# EAGLE board RT5350F_OLinuXino_EVB_Rev_A (EAGLE 4.16)
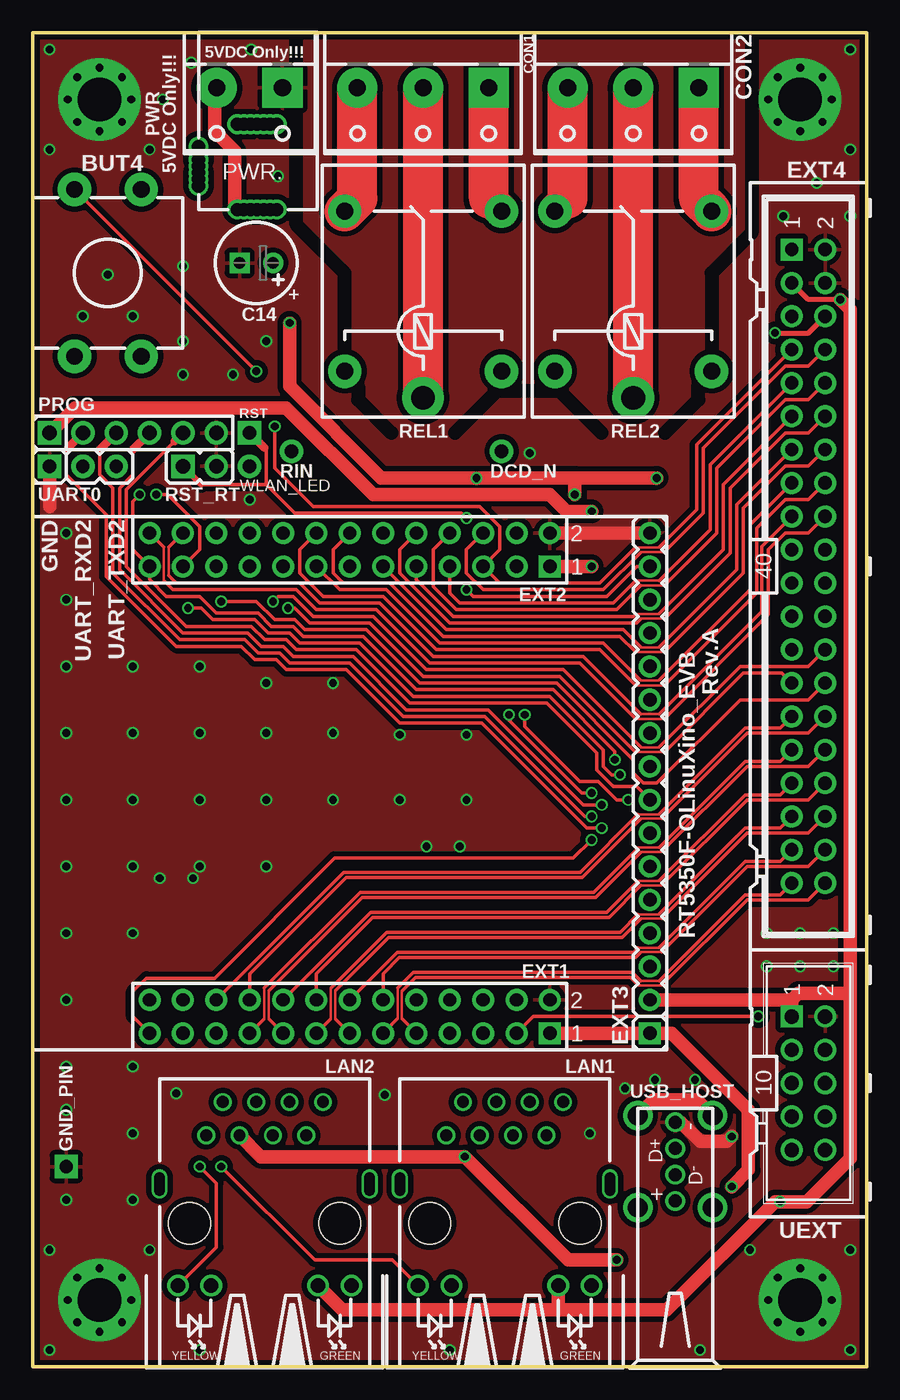
[diagram p0: board, top side]
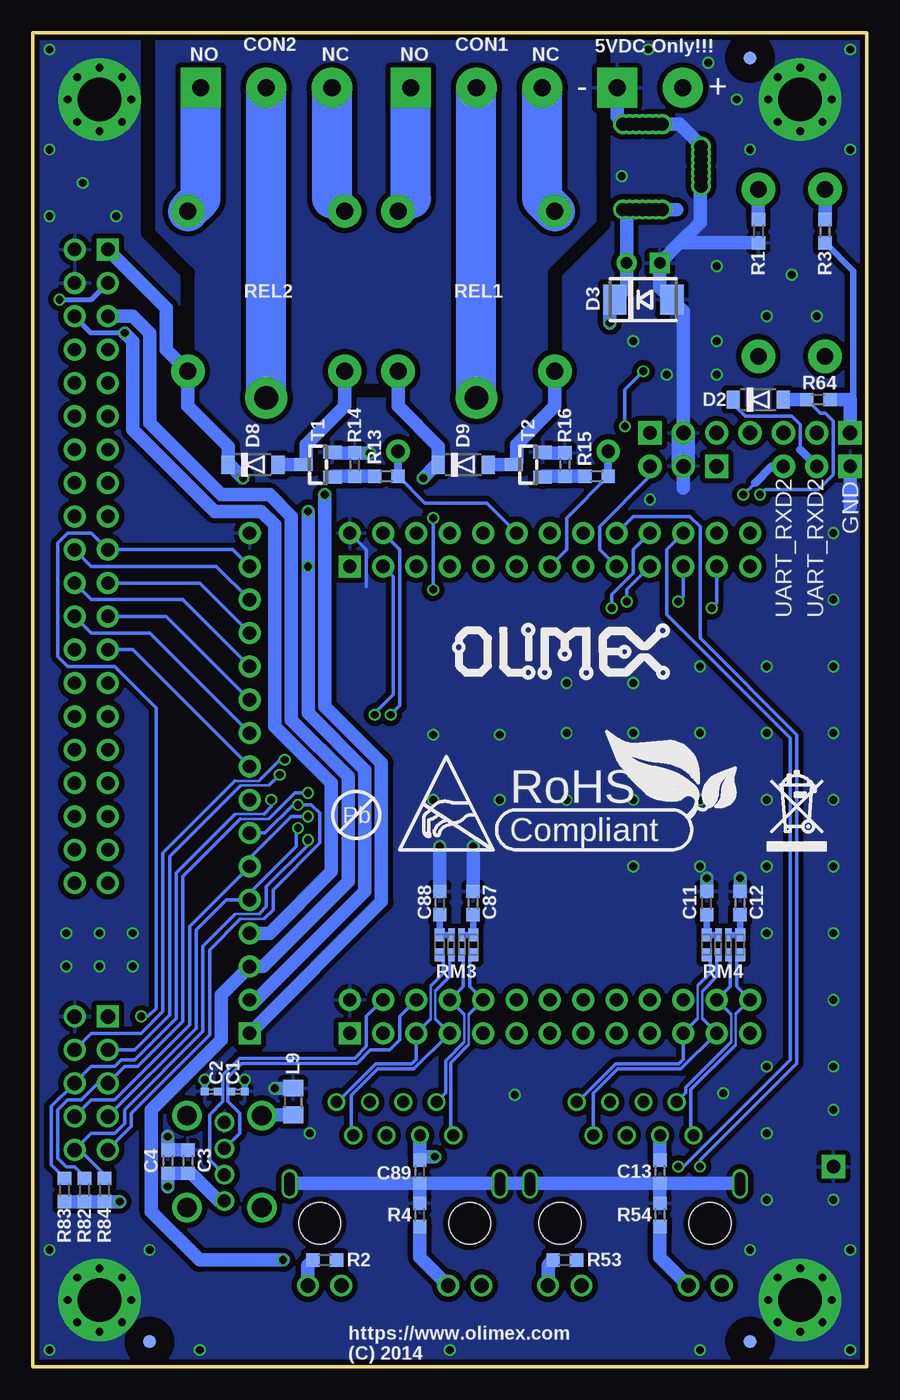
[diagram p1: board, bottom side, seen from below]

Size 63.5 x 101.6 mm. Coordinates in mm from the lower left corner, seen from the top.
Outline: 0,101.6 0,0 63.5,0 63.5,101.6 0,101.6
Copper layers (1*16): Top 0.035mm / dielectric 1.5mm / Bottom 0.035mm
Design rules "default": minimum track width 4mil, minimum drill 0.25mm, track to track 5mil, track to pad 5mil, pad to pad 5mil, via to via 5mil, smd to smd 1mil, copper to edge 10mil, drill to drill 8mil, minimum pad ring 6mil, minimum via ring 4mil, stop-mask expansion 4mil, vias tented up to drill 24mil, thermal gap 15mil
Net classes: 4 REL: width 2.032 mm, drill 2.54 mm
tRestrict: 14 lines
bRestrict: 8 lines

## Footprints (pad centres in the part's own frame; a part is rotated, then mirrored left to right if it is on the bottom)
SW_TAKT12X12SS = drill 1.27 pad 2.54 round: P$1 -2.54,-6.35; P$2 2.54,-6.35; P$3 2.54,6.35; P$4 -2.54,6.35
C0402_TI = smd 0.61 x 0.584: 1 -0.508,0; 2 0.508,0
C0603_DWS = smd 1.016 x 1.016: 1 -0.889,0; 2 0.889,0
E2,5-6,3 = drill 0.864 pad 1.524 round: + -1.27,0 | drill 0.864 pad 1.524 square: - 1.27,0
DG306-5.0_3P = drill 1.3 pad 3.048 square: 1 -5,0 | drill 1.3 pad 3.048 round: 2 0,0; 3 5,0
SOD-123 = smd 1 x 1.4: A 1.9,0; C -1.9,0
DO214AA = smd 1.778 x 2.286: A 2.177,0; C -2.177,0
TESTPAD = drill 1.016 pad 1.778 round: P$1 0,0
PN2X13 = drill 1.016 pad 1.676 square: 1 -15.24,1.27 | drill 1.016 pad 1.676 round: 2 -15.24,-1.27; 3 -12.7,1.27; 4 -12.7,-1.27; 5 -10.16,1.27; 6 -10.16,-1.27; 7 -7.62,1.27; 8 -7.62,-1.27; 9 -5.08,1.27; 10 -5.08,-1.27; 11 -2.54,1.27; 12 -2.54,-1.27; 13 0,1.27; 14 0,-1.27; 15 2.54,1.27; 16 2.54,-1.27; 17 5.08,1.27; 18 5.08,-1.27; 19 7.62,1.27; 20 7.62,-1.27; 21 10.16,1.27; 22 10.16,-1.27; 23 12.7,1.27; 24 12.7,-1.27; 25 15.24,1.27; 26 15.24,-1.27
HN1X16 = drill 1.016 pad 1.676 square: 1 -17.78,0 | drill 1.016 pad 1.676 round: 2 -15.24,0; 3 -12.7,0; 4 -10.16,0; 5 -7.62,0; 6 -5.08,0; 7 -2.54,0; 8 0,0; 9 2.54,0; 10 5.08,0; 11 7.62,0; 12 10.16,0; 13 12.7,0; 14 15.24,0; 15 17.78,0; 16 20.32,0
ML40 = drill 1.016 pad 1.676 square: 1 -24.13,-1.27 | drill 1.016 pad 1.676 round: 2 -24.13,1.27; 3 -21.59,-1.27; 4 -21.59,1.27; 5 -19.05,-1.27; 6 -19.05,1.27; 7 -16.51,-1.27; 8 -16.51,1.27; 9 -13.97,-1.27; 10 -13.97,1.27; 11 -11.43,-1.27; 12 -11.43,1.27; 13 -8.89,-1.27; 14 -8.89,1.27; 15 -6.35,-1.27; 16 -6.35,1.27; 17 -3.81,-1.27; 18 -3.81,1.27; 19 -1.27,-1.27; 20 -1.27,1.27; 21 1.27,-1.27; 22 1.27,1.27; 23 3.81,-1.27; 24 3.81,1.27; 25 6.35,-1.27; 26 6.35,1.27; 27 8.89,-1.27; 28 8.89,1.27; 29 11.43,-1.27; 30 11.43,1.27; 31 13.97,-1.27; 32 13.97,1.27; 33 16.51,-1.27; 34 16.51,1.27; 35 19.05,-1.27; 36 19.05,1.27; 37 21.59,-1.27; 38 21.59,1.27; 39 24.13,-1.27; 40 24.13,1.27
TEST_PAD40/70/SQUARE = drill 1.016 pad 1.778 square: P$1 0,0
L0805_5MIL_DWS = smd 1.27 x 1.524: 1 -1.016,0; 2 1.016,0
RJLBC-060TC1_MILLING = drill 0.9 round: 1 -4.455,6.7; 2 -3.185,9.24; 3 -1.915,6.7; 4 -0.645,9.24; 5 0.625,6.7; 6 1.895,9.24; 7 3.165,6.7; 8 4.435,9.24 | drill 0.8 round: _1 -8,2.5; _2 -8,2.7; _3 -8,2.9; _4 -8,3.3; _5 -8,3.5; _6 8,3.5; _7 8,3.3; _8 8,2.9; _9 8,2.7; _10 8,2.5; GND1 -8,3.1; GND2 8,3.1 | drill 1.1 round: AG 4.07,-4.748; AY -6.61,-4.748; KG 6.61,-4.748; KY -4.07,-4.748 | hole 3.2: -5.715,0; 5.715,0
PN1X6 = drill 1.1 pad 1.778 square: 1 -6.35,0 | drill 1.1 pad 1.778 round: 2 -3.81,0; 3 -1.27,0; 4 1.27,0; 5 3.81,0; 6 6.35,0
PWR_JACK_UNI_MILLING = drill 1 round: + 0,4.75; +1 0,5.25; +2 0,5.75; +3 0,6.25; +4 0,4.25; +5 0,3.75; +6 0,3.25; - -6.5,4.75; -1 -6.5,5.25; -2 -6.5,5.75; -3 -6.5,4.25; -4 -6.5,3.75; -5 -6.5,6.25; -6 -6.5,3.25; -- -3.3,0.3; --1 -3.8,0.3; --2 -4.3,0.3; --3 -4.8,0.3; --4 -2.8,0.3; --5 -2.3,0.3; --6 -1.8,0.3
DG306-5.0_2P = drill 1.3 pad 3.048 square: 1 -2.5,0 | drill 1.3 pad 3.048 round: 2 2.5,0
R0603_5MIL_DWS = smd 1.016 x 1.016: 1 -0.889,0; 2 0.889,0
H200-FAT = drill 1.295 pad 2.54 round: 1 -7.493,-5.969; 2 -7.493,5.969; O 4.699,5.969; S 4.699,-5.969 | drill 1.803 pad 3.175 round: P -9.525,0
R_MATRIX_4 = smd 0.762 x 1.016: 1.1 -1.27,-0.762; 1.2 -1.27,0.762; 4.1 1.27,-0.762; 4.2 1.27,0.762 | smd 0.508 x 1.016: 2.1 -0.381,-0.762; 2.2 -0.381,0.762; 3.1 0.381,-0.762; 3.2 0.381,0.762
JP1 = drill 1.1 pad 1.778 square: 1 0,-1.27 | drill 1.1 pad 1.778 round: 2 0,1.27
SOT23 = smd 1.4 x 1: 1 1.1,-0.95; 2 1.1,0.95; 3 -1.1,0
FIDUCIAL-1X3 = smd 1 x 1: 1 0,0
HN1X3 = drill 1 pad 1.778 square: 1 -2.54,0 | drill 1 pad 1.778 round: 2 0,0; 3 2.54,0
ML10-MALE = drill 1.1 pad 1.676 square: 1 -5.08,-1.27 | drill 1.1 pad 1.676 round: 2 -5.08,1.27; 3 -2.54,-1.27; 4 -2.54,1.27; 5 0,-1.27; 6 0,1.27; 7 2.54,-1.27; 8 2.54,1.27; 9 5.08,-1.27; 10 5.08,1.27
USB_A_VERTICAL_PTH = drill 1 round: 1 3.45,12.75; 2 3.45,14.75; 3 3.45,16.75; 4 3.45,18.75 | drill 1.5 round: P$1 0.6,12.25; P$2 6.3,12.25; P$3 6.3,19.25; P$4 0.6,19.25

## Placement (x,y rotation side)
BUT4  DTSM24R(12x12x10)  [SW_TAKT12X12SS]  5.71,83.31 180 top
C1  NA  [C0402_TI]  47.88,20.95 0 bottom
C2  NA  [C0402_TI]  49.91,20.95 180 bottom
C3  100nF  [C0603_DWS]  51.69,15.62 90 bottom
C4  22uF  [C0603_DWS]  53.21,15.62 90 bottom
C11  100nF  [C0603_DWS]  12.19,35.31 270 bottom
C12  100nF  [C0603_DWS]  9.65,35.31 270 bottom
C13  100nF  [C0603_DWS]  15.75,14.86 90 bottom
C14  470uF/10V/105C  [E2,5-6,3]  17.02,84.07 180 top
C87  100nF  [C0603_DWS]  29.97,35.31 270 bottom
C88  100nF  [C0603_DWS]  32.51,35.31 270 bottom
C89  100nF  [C0603_DWS]  34.04,14.86 90 bottom
CON1  CON3-DG306-5.0_3P(TB3-5MM)  [DG306-5.0_3P]  29.72,97.41 180 top
CON2  CON3-DG306-5.0_3P(TB3-5MM)  [DG306-5.0_3P]  45.72,97.41 180 top
D2  1N5819(S4SOD-123)  [SOD-123]  8.26,73.66 0 bottom
D3  SMBJ6.0A  [DO214AA]  17.02,81.28 0 bottom
D8  1N5819(S4SOD-123)  [SOD-123]  46.74,68.71 0 bottom
D9  1N5819(S4SOD-123)  [SOD-123]  30.73,68.71 0 bottom
DCD_N  TESTPAD40/70  [TESTPAD]  35.69,69.72 0 top
EXT1  PN2x13  [PN2X13]  24.13,26.67 180 top
EXT2  PN2x13  [PN2X13]  24.13,62.23 180 top
EXT3  PN1X16  [HN1X16]  46.99,43.18 90 top
EXT4  BH40S  [ML40]  59.05,60.96 270 top
GND_PIN  TESTPAD3  [TEST_PAD40/70/SQUARE]  2.54,15.24 0 top
L9  FB0805/600R/2A  [L0805_5MIL_DWS]  43.69,20.19 270 bottom
LAN1  RJLBC-060TC1_GND_MILLING  [RJLBC-060TC1_MILLING]  35.94,10.92 0 top
LAN2  RJLBC-060TC1_GND_MILLING  [RJLBC-060TC1_MILLING]  17.65,10.92 0 top
PROG  NA(PN1X6)  [PN1X6]  7.62,71.12 0 top
PWR  YDJ-1136  [PWR_JACK_UNI_MILLING]  12.32,88.14 270 top
PWR.  NA(TB2/3.5mm)  [DG306-5.0_2P]  16.51,97.41 180 top
R1  560R  [R0603_5MIL_DWS]  8.26,86.49 90 bottom
R2  NA  [R0603_5MIL_DWS]  41.27,8.13 0 bottom
R3  10k  [R0603_5MIL_DWS]  3.17,86.49 270 bottom
R4  560R  [R0603_5MIL_DWS]  34.04,11.56 90 bottom
R13  1k  [R0603_5MIL_DWS]  36.58,67.82 0 bottom
R14  10k  [R0603_5MIL_DWS]  38.99,68.71 90 bottom
R15  1k  [R0603_5MIL_DWS]  20.57,67.82 0 bottom
R16  10k  [R0603_5MIL_DWS]  22.99,68.71 90 bottom
R53  NA  [R0603_5MIL_DWS]  22.99,8.13 0 bottom
R54  560R  [R0603_5MIL_DWS]  15.75,11.56 90 bottom
R64  10k  [R0603_5MIL_DWS]  3.68,73.66 0 bottom
R82  NA(2.2k)  [R0603_5MIL_DWS]  59.56,13.46 270 bottom
R83  NA(2.2k)  [R0603_5MIL_DWS]  61.09,13.46 270 bottom
R84  47k  [R0603_5MIL_DWS]  58.04,13.46 270 bottom
REL1  RAS-05-15  [H200-FAT]  29.72,83.31 90 top
REL2  RAS-05-15  [H200-FAT]  45.72,83.31 90 top
RIN  TESTPAD40/70  [TESTPAD]  19.68,69.72 0 top
RM3  NA(RA1206_(4X0603)_4B8_51R)  [R_MATRIX_4]  31.24,32.13 0 bottom
RM4  NA(RA1206_(4X0603)_4B8_51R)  [R_MATRIX_4]  10.92,32.13 0 bottom
RST  TESTPAD3  [TEST_PAD40/70/SQUARE]  16.51,71.12 0 top
RST_RT  NA(HN1x2)  [JP1]  12.7,68.58 270 top
T1  BC817-40(SMD)  [SOT23]  41.78,68.71 0 bottom
T2  BC817-40(SMD)  [SOT23]  25.78,68.71 0 bottom
U18  FIDUCIAL  [FIDUCIAL-1X3]  8.89,1.91 0 bottom
U19  FIDUCIAL  [FIDUCIAL-1X3]  54.61,1.91 0 bottom
U20  FIDUCIAL  [FIDUCIAL-1X3]  8.89,99.69 0 bottom
U$3  [PB_SMALL]  38.86,42.04 0 bottom
U$8  [RECYCLE_BIN1/8]  7.62,39.24 0 bottom
U$9  [ROHS]  27.18,40.01 0 bottom
U$10  [OLIMEX1_V]  13.84,52.2 0 bottom
U$11  [ESD_SYMBOL]  35.56,39.37 0 bottom
UART0  HN1X3  [HN1X3]  3.81,68.58 0 top
UEXT  BH10S  [ML10-MALE]  59.05,21.59 270 top
USB_HOST  USB_A_VERTICAL  [USB_A_VERTICAL_PTH]  45.47,-0.13 0 top
WLAN_LED  TESTPAD40/70  [TESTPAD]  16.51,68.58 0 top

## Library data of the parts
BUT4 D2 D8 D9 DCD_N GND_PIN PWR RIN RST WLAN_LED = gogo
C1-C4 C11-C14 C87-C89 L9 R1-R4 R13-R16 R53 R54 R64 R82-R84 = rcl
CON1 CON2 EXT3 PROG PWR. UART0 = Penko
D3 RM3 RM4 = OLIMEX_DISCRET
EXT1 EXT2 EXT4 UEXT = con-harting-ml
LAN1 LAN2 USB_HOST = OLIMEX_CONNECTORS
REL1 REL2 = DOUBLE-SIDE
RST_RT = jumper
T1 T2 = semicon-smd-ipc
U18-U20 = SparkFunEagle-6-6-07
U$3 U$8-U$11 = olimex_logo1

## Nets
+5V: C3.1 C4.1 C14.+ D3.C D8.C D9.C EXT1.1 EXT3.1 EXT4.1 PWR.+ PWR..2 REL1.1 REL2.1 USB_HOST.1
COMP: EXT3.13 EXT4.21
CTS_N: EXT2.11 EXT4.13
DCD_N: DCD_N.P$1 EXT2.12 R13.2
DSR_N: EXT2.14 EXT4.14
DTR_N: EXT2.16 EXT4.16
EJTAG_TCK: EXT2.8 EXT4.10
EJTAG_TDI: EXT2.6 EXT4.8
EJTAG_TDO: EXT2.9 EXT4.11
EJTAG_TMS: EXT2.7 EXT4.9
EJTAG_TRSTN: EXT2.10 EXT4.12
EXT_LDO_1P2: EXT3.11 EXT4.23
FB: EXT3.10 EXT4.24
GND: C1.2 C2.2 C3.2 C4.2 C11.1 C12.1 C13.1 C14.- C87.1 C88.1 C89.1 D3.A EXT1.2 EXT2.2 EXT3.16 EXT4.2 EXT4.4 GND_PIN.P$1 L9.1 LAN1.GND1 LAN1.GND2 LAN2.GND1 LAN2.GND2 PROG.6 PWR.- PWR.-- PWR..1 R1.1 R4.2 R14.2 R16.2 R54.2 RST_RT.2 T1.2 T2.2 UART0.1 UEXT.2 USB_HOST.4
GPIO0: BUT4.P$2 EXT2.5 EXT4.7 R3.1
I2C_SCLK: EXT2.4 R82.1 UEXT.5
I2C_SD: EXT2.3 R83.1 UEXT.6
LDOSEL: EXT3.12 EXT4.22
LGATE: EXT3.9 EXT4.25
LINK0: EXT2.18 LAN2.AY
LINK1: EXT2.19 EXT4.26
LINK2: EXT2.20 EXT4.27
LINK3: EXT2.21 EXT4.28
LINK4: EXT2.22 LAN1.AY
N$1: BUT4.P$1 R1.2
N$3: L9.2 USB_HOST.P$3 USB_HOST.P$4
N$4: D8.A REL2.2 T1.3
N$6: D2.C UART0.2
N$11: R13.1 R14.1 T1.1
N$12: R15.1 R16.1 T2.1
N$17: C11.2 RM4.1.2 RM4.2.2
N$18: C12.2 RM4.3.2 RM4.4.2
N$20: LAN2.KG R53.1
N$21: LAN2.KY R54.1
N$22: R53.2
N$27 [REL]: CON2.2 REL2.P
N$32: D9.A REL1.2 T2.3
N$33: C88.2 RM3.1.2 RM3.2.2
N$34 [REL]: CON1.2 REL1.P
N$47: C87.2 RM3.3.2 RM3.4.2
N$53: LAN1.KG R2.1
N$57: LAN1.KY R4.1
N$68: R2.2
PORSTN: EXT1.3 EXT3.15 EXT4.19 RST.P$1 RST_RT.1
REL1_NC [REL]: CON1.3 REL1.O
REL1_NO [REL]: CON1.1 REL1.S
REL2_NC [REL]: CON2.3 REL2.O
REL2_NO [REL]: CON2.1 REL2.S
RIN: EXT2.13 R15.2 RIN.P$1
RTS_N: EXT2.15 EXT4.15
RXD: EXT2.26 EXT4.18
RXIM0: EXT1.21 LAN2.8 RM4.1.1
RXIM1: EXT1.17 EXT4.32
RXIM2: EXT1.13 EXT4.36
RXIM3: EXT1.9 EXT4.40
RXIM4: EXT1.5 LAN1.8 RM3.1.1
RXIP0: EXT1.23 LAN2.7 RM4.2.1
RXIP1: EXT1.19 EXT4.31
RXIP2: EXT1.15 EXT4.35
RXIP3: EXT1.11 EXT4.39
RXIP4: EXT1.7 LAN1.7 RM3.2.1
SPI_CLK: EXT3.7 PROG.4 UEXT.9
SPI_CS0: EXT3.8 PROG.5
SPI_CS1: EXT1.25 R84.1 UEXT.10
SPI_MISO: EXT3.5 PROG.2 UEXT.7
SPI_MOSI: EXT3.6 PROG.3 UEXT.8
TXD: EXT2.24 EXT4.17
TXOM0: EXT1.24 LAN2.2 RM4.3.1
TXOM1: EXT1.20 EXT4.30
TXOM2: EXT1.16 EXT4.34
TXOM3: EXT1.12 EXT4.38
TXOM4: EXT1.8 LAN1.2 RM3.3.1
TXOP0: EXT1.26 LAN2.1 RM4.4.1
TXOP1: EXT1.22 EXT4.29
TXOP2: EXT1.18 EXT4.33
TXOP3: EXT1.14 EXT4.37
TXOP4: EXT1.10 LAN1.1 RM3.4.1
UART_RXD2: D2.A EXT2.25 R64.1 UEXT.4
UART_TXD2: EXT2.23 UART0.3 UEXT.3
UGATE: EXT3.14 EXT4.20
UPHY0_PADM: C2.1 EXT1.4 USB_HOST.2
UPHY0_PADP: C1.1 EXT1.6 USB_HOST.3
VCC: EXT2.1 EXT3.2 EXT4.3 LAN1.AG LAN2.AG PROG.1 R3.2 R64.2 R82.2 R83.2 R84.2 UEXT.1
VEE: EXT3.4 EXT4.6
VPP: C13.2 C89.2 EXT3.3 EXT4.5 LAN1.3 LAN2.3
WLAN_LED: EXT2.17 WLAN_LED.P$1

## Tracks (layer width: path | path; a pad name or v marks a point on that pad's centre or on a via)
+5V  (via drill 0.6)
  Top 1.016: EXT1.1 EXT3.1 48.64,25.4 54.48,19.56 54.48,14.99 v53.21,13.72 | 41.27,67.69 v33.78,67.69 26.54,67.69 19.56,74.68 v19.56,79.5 | 41.27,67.69 v47.5,67.69 | v41.27,66.42 41.27,67.69 | PWR..2 13.84,97.24 13.84,94.11 15.37,92.58 15.37,88.52 15.75,88.14 PWR.+
  Bottom 1.016: USB_HOST.1 49.33,12.62 51.44,14.73 C3.1 C4.1 v53.21,13.72 | 14.48,88.14 PWR.+ 17.78,88.14 18.29,87.63 C14.+ 18.29,82.19 D3.C 19.56,80.92 v19.56,79.5 | EXT3.1 36.96,35.43 36.96,45.97 41.27,50.29 v41.27,66.42 | REL1.1 35.69,73.15 32.63,70.1 D9.C 32.77,68.71 v33.78,67.69 | v47.5,67.69 48.51,68.71 D8.C 48.64,70.1 51.69,73.15 REL2.1 53.34,77.47 53.34,80.64 EXT4.1
COMP
  Bottom 0.254: EXT3.13 50.8,59.69 EXT4.21
CTS_N
  Top 0.203: 46.28,54.81 46.3,54.79 47.68,54.79 47.7,54.81
  Top 0.254: EXT2.11 31.5,56.13 44.96,56.13 46.28,54.81 | EXT4.13 53.59,65.66 53.59,60.71 47.7,54.81
DCD_N
  Bottom 0.254: EXT2.12 28.96,65.79 33.66,65.79 R13.2
  Bottom 0.61: R13.2 DCD_N.P$1
DSR_N
  Top 0.203: 45.87,54.46 45.9,54.43 48.08,54.43 48.11,54.46
  Top 0.254: EXT2.14 22.86,62.23 22.86,60.45 23.62,59.69 27.18,59.69 31.24,55.63 44.7,55.63 45.87,54.46 | EXT4.14 59.05,68.58 57.28,68.58 54.1,65.41 54.1,60.45 48.11,54.46
DTR_N
  Top 0.203: 45.87,51.92 45.9,51.89 48.08,51.89 48.11,51.92
  Top 0.254: EXT2.16 20.32,62.23 20.32,60.45 22.1,58.67 26.67,58.67 30.73,54.61 43.18,54.61 45.87,51.92 | EXT4.16 59.05,66.04 57.28,66.04 55.12,63.88 55.12,58.93 48.11,51.92
EJTAG_TCK
  Top 0.203: 46.28,59.49 46.3,59.51 48.08,59.51 48.11,59.54
  Top 0.254: EXT2.8 30.48,62.23 30.48,59.44 32.26,57.66 44.45,57.66 46.28,59.49 | EXT4.10 59.05,73.66 57.28,73.66 52.07,68.45 52.07,63.5 48.11,59.54
EJTAG_TDI
  Top 0.203: 46.28,62.03 46.3,62.05 48.08,62.05 48.11,62.08
  Top 0.254: EXT2.6 33.02,62.23 33.02,60.45 34.29,59.18 43.43,59.18 46.28,62.03 | EXT4.8 59.05,76.2 57.28,76.2 51.05,69.98 51.05,65.02 48.11,62.08
EJTAG_TDO
  Top 0.203: 45.87,57.3 45.9,57.33 47.68,57.33 47.7,57.35
  Top 0.254: EXT2.9 29.21,59.94 32,57.15 45.72,57.15 45.87,57.3 | EXT4.11 52.58,67.18 52.58,62.23 47.7,57.35
EJTAG_TMS
  Top 0.203: 45.87,59.84 45.9,59.87 47.68,59.87 47.7,59.89
  Top 0.254: EXT2.7 31.75,58.93 32.51,58.17 44.2,58.17 45.87,59.84 | EXT4.9 51.56,68.71 51.56,63.75 47.7,59.89
EJTAG_TRSTN
  Top 0.203: 46.28,56.95 46.3,56.97 48.08,56.97 48.11,57
  Top 0.254: EXT2.10 27.94,62.23 27.94,60.45 31.75,56.64 45.97,56.64 46.28,56.95 | EXT4.12 59.05,71.12 57.28,71.12 53.09,66.93 53.09,61.98 48.11,57
EXT_LDO_1P2
  Bottom 0.254: EXT3.11 53.34,57.15 EXT4.23
FB
  Bottom 0.254: EXT4.24 59.05,55.88 54.61,55.88 EXT3.10
GND  (via drill 0.6, 3.3 pad 6.3)
  Top 1.016: v53.21,17.53 52.83,17.14 50.8,17.14 49.32,18.62 USB_HOST.4 | EXT2.2 EXT3.16 | UART0.1 1.27,65.53
  Bottom 0.254: EXT2.2 38.1,62.23 38.1,59.44
  Bottom 0.508: C1.2 v47.37,21.84 | C2.2 v50.42,21.84
  Bottom 1.016: C88.1 v32.51,39.62 | C87.1 v29.97,39.62 | C11.1 v12.19,37.21 | LAN2.GND1 9.65,13.97 C13.1 | C13.1 25.65,13.97 | C89.1 43.94,13.97 LAN1.GND2 | 27.94,13.97 LAN1.GND1 | 27.94,13.97 C89.1 | C89.1 R4.2 | L9.1 v45.09,21.21 | C3.2 C4.2 v53.21,17.53 | 25.65,13.97 LAN2.GND2 | 12.7,91.36 PWR.-- | 12.7,91.36 12.7,93.09 14.25,94.64 PWR.- 18.44,94.64 19.01,95.21 PWR..1 | 12.7,91.36 12.7,87.12 14.22,85.6 | 14.22,85.6 C14.- 15.75,82.19 D3.A 13.97,80.41 PROG.6 | T2.2 24.62,69.6 R16.2 | T1.2 40.62,69.6 R14.2 v37.85,69.6 | 14.22,85.6 R1.1 | C12.1 v9.65,37.21 | 1.27,65.53 UART0.1 | C13.1 R54.2 | 25.65,13.97 27.94,13.97 | 13.97,66.93 RST_RT.2
  Bottom 1.778: RST_RT.2 PROG.6
  other vias: 27.94,43.18 27.94,48.13 5.08,5.08 3.37,6.79 5.08,7.49 6.79,6.79 7.49,5.08 6.79,3.37 5.08,2.67 3.37,3.37 2.67,5.08 58.42,5.08 56.01,5.08 56.71,6.79 58.42,7.49 60.13,6.79 60.83,5.08 60.13,3.37 58.42,2.67 56.71,3.37 58.42,96.52 56.01,96.52 56.71,98.23 58.42,98.93 60.13,98.23 60.83,96.52 60.13,94.81 58.42,94.11 56.71,94.81 5.08,96.52 2.67,96.52 3.37,98.23 5.08,98.93 6.79,98.23 7.49,96.52 6.79,94.81 5.08,94.11 3.37,94.81 1.27,1.27 12.7,1.27 8.89,8.89 1.27,8.89 50.8,1.27 62.23,1.27 62.23,8.89 54.61,8.89 22.86,52.07 22.86,48.26 22.86,43.18 33.02,48.13 55.88,30.48 58.42,30.48 60.96,30.48 60.96,33.02 58.42,33.02 55.88,33.02 2.54,12.7 7.62,12.7 7.62,17.78 7.62,22.86 62.23,100.33 62.23,92.71 1.27,100.33 9.91,96.52 1.27,92.71 8.89,92.71 5.71,83.19 11.43,83.82 3.81,80.01 7.62,80.01 11.43,78.11 11.43,75.56 17.78,78.11 15.24,75.56 16.51,66.04 16.64,100.33 12.06,99.31 18.67,90.68 59.69,90.17 57.15,87.63 62.23,87.63 2.54,27.94 2.54,33.02 7.62,33.02 12.7,38.1 2.54,38.1 17.78,43.18 12.7,43.18 7.62,43.18 2.54,43.18 17.78,48.26 33.02,43.18 12.7,48.26 12.7,53.34 2.54,48.26 7.62,48.26 7.62,53.34 2.54,53.34 2.54,58.42 2.54,63.5 7.62,38.1 17.78,52.07 42.42,17.78 26.8,20.7 2.54,22.86 2.54,19.56 17.78,38.1 10.92,20.83 31.75,1.27
  pour Top (isolate 0.406): -2.54,104.14 66.04,104.14 66.04,-2.54 -2.54,-2.54
  pour Bottom (isolate 0.406): -5.08,-5.08 -5.08,106.68 68.58,106.68 68.58,-5.08
GPIO0  (via drill 0.6)
  Top 0.203: 45.87,62.38 45.9,62.41 47.68,62.41 47.7,62.43
  Top 0.254: 45.87,62.38 43.18,59.69 35.56,59.69 EXT2.5 35.56,62.23 35.56,64.01 34.04,65.53 21.34,65.53 18.41,68.45 v18.41,71.63 | EXT4.7 50.55,70.23 50.55,65.28 47.7,62.43 | v17.02,75.82 BUT4.P$2
  Bottom 0.254: v18.41,71.63 18.41,74.42 v17.02,75.82
  Bottom 1.016: BUT4.P$2 R3.1
I2C_SCLK  (via drill 0.6)
  Top 0.254: v36.26,49.66 36.26,49.21 41.78,43.69 v42.55,43.69
  Bottom 0.203: 47.7,41.71 47.68,41.73 45.52,41.73 45.49,41.76
  Bottom 0.254: 47.7,41.71 52.07,37.34 52.07,26.29 55.5,22.86 56.52,22.86 UEXT.5 58.55,21.59 59.82,20.32 60.83,20.32 61.59,19.56 61.59,15.88 60.96,15.24 60.33,15.24 59.56,14.48 R82.1 | 45.49,41.76 43.56,43.69 v42.55,43.69 | EXT2.4 35.56,62.23 35.56,50.35 v36.26,49.66
I2C_SD  (via drill 0.6)
  Top 0.254: v45.34,43.18 44.45,43.18 43.05,44.58 41.66,44.58 37.47,48.77 v37.47,49.66
  Bottom 0.203: 48.11,42.06 48.08,42.09 45.92,42.09 45.9,42.11
  Bottom 0.254: 48.11,42.06 52.58,37.59 52.58,26.54 55.75,23.37 56.77,23.37 57.28,22.86 59.05,22.86 UEXT.6 62.1,19.81 62.1,15.37 R83.1 | 45.9,42.11 45.34,42.67 v45.34,43.18 | EXT2.3 36.07,60.2 36.07,51.18 37.47,49.78 v37.47,49.66
LDOSEL
  Bottom 0.254: EXT4.22 59.05,58.42 52.07,58.42 EXT3.12
LGATE
  Bottom 0.254: EXT3.9 55.88,54.61 EXT4.25
LINK0  (via drill 0.6)
  Top 0.254: LAN2.AY 13.97,9.1 13.97,13.97 v12.7,15.24
  Bottom 0.254: EXT2.18 17.78,64.77 13.46,64.77 12.7,64.01 12.7,55.5 5.33,48.13 5.33,23.11 12.7,15.75 v12.7,15.24
LINK1  (via drill 0.6)
  Top 0.203: 46.28,47.19 46.3,47.17 47.68,47.17 47.7,47.19
  Top 0.254: v18.29,58.29 18.67,58.67 19.81,58.67 21.34,57.15 25.91,57.15 29.97,53.09 40.39,53.09 46.28,47.19 | EXT4.26 59.05,53.34 53.85,53.34 47.7,47.19
  Bottom 0.254: v18.29,58.29 18.29,59.18 EXT2.19
LINK2  (via drill 0.6)
  Top 0.203: 45.87,46.84 45.9,46.81 48.08,46.81 48.11,46.84
  Top 0.254: v19.43,57.78 19.94,57.78 21.08,56.64 25.65,56.64 29.72,52.58 40.13,52.58 45.87,46.84 | 48.11,46.84 54.1,52.83 57.02,52.83 EXT4.27
  Bottom 0.254: EXT2.20 17.78,62.23 17.78,60.45 19.43,58.8 v19.43,57.78
LINK3  (via drill 0.6)
  Top 0.254: v14.35,58.29 17.02,58.29 18.41,56.9 19.94,56.9 20.7,56.13 25.4,56.13 29.46,52.07 39.88,52.07 45.72,46.23 45.72,45.21 46.48,44.45 47.5,44.45 53.85,50.8 59.05,50.8 EXT4.28
  Bottom 0.254: v14.35,58.29 13.97,58.67 EXT2.21
LINK4  (via drill 0.6)
  Top 0.254: v14.35,15.24 21.46,8.13 27.38,8.13 LAN1.AY
  Bottom 0.254: EXT2.22 15.24,62.23 15.24,57.28 5.84,47.88 5.84,23.37 13.97,15.24 v14.35,15.24
N$1
  Bottom 1.016: R1.2 BUT4.P$1
N$3
  Top 1.016: USB_HOST.P$4 47.26,20.32 50.57,20.32 USB_HOST.P$3
  Bottom 1.016: USB_HOST.P$4 46.01,19.18 L9.2
N$4
  Bottom 1.016: D8.A T1.3 42.67,68.92 42.67,70.23 39.75,73.15 REL2.2
N$6
  Bottom 0.254: D2.C 10.15,73.27 9.27,72.39 5.71,72.39 5.08,71.75 5.08,69.85
  Bottom 0.61: UART0.2 5.08,69.85
N$11
  Bottom 1.016: T1.1 40.62,67.82 R14.1 R13.1
N$12
  Bottom 1.016: T2.1 24.62,67.82 R16.1 R15.1
N$17
  Bottom 0.508: C11.2 RM4.1.2 RM4.2.2
N$18
  Bottom 0.508: RM4.3.2 RM4.4.2 C12.2
N$20
  Bottom 1.016: LAN2.KG 24.26,7.74 R53.1
N$21
  Bottom 1.016: LAN2.KY 15.75,8.34 R54.1
N$27
  Top 3.048: REL2.P CON2.2
  Bottom 3.048: REL2.P CON2.2
N$32
  Bottom 1.016: D9.A T2.3 26.67,68.92 26.67,70.23 23.75,73.15 REL1.2
N$33
  Bottom 0.508: C88.2 RM3.1.2 RM3.2.2
N$34
  Top 3.048: REL1.P CON1.2
  Bottom 3.048: REL1.P CON1.2
N$47
  Bottom 0.508: RM3.3.2 RM3.4.2 C87.2
N$53
  Bottom 1.016: LAN1.KG 42.55,7.74 R2.1
N$57
  Bottom 1.016: LAN1.KY 34.04,8.34 R4.1
PORSTN  (via drill 0.6)
  Top 0.254: EXT1.3 38.1,26.67 v55.24,26.67 | EXT3.15 45.97,60.96 43.69,58.67 33.53,58.67 v33.02,59.18 | v33.02,64.64 32.64,65.02 19.94,65.02 17.78,67.18 | 17.78,67.18 12.83,67.18 | 17.78,67.18 17.78,69.85 17.65,69.98
  Top 0.406: 12.83,67.18 RST_RT.1
  Top 0.61: 17.65,69.98 RST.P$1
  Bottom 0.254: EXT3.15 48.26,62.23 EXT4.19 59.05,63.5 60.83,63.5 61.59,62.74 61.59,54.1 60.83,53.34 57.28,53.34 54.1,50.16 54.1,27.3 54.74,26.67 v55.24,26.67 | v33.02,59.18 v33.02,64.64
REL1_NC
  Top 3.048: CON1.3 24.72,88.98 REL1.O
  Bottom 3.048: CON1.3 24.72,88.98 REL1.O
REL1_NO
  Top 2.54: REL1.S 34.72,88.98
  Top 3.048: 34.72,88.98 CON1.1
  Bottom 2.54: REL1.S 34.72,88.98
  Bottom 3.048: 34.72,88.98 CON1.1
REL2_NC
  Top 2.54: REL2.O 40.72,88.98
  Top 3.048: 40.72,88.98 CON2.3
  Bottom 2.54: REL2.O 40.72,88.98
  Bottom 3.048: 40.72,88.98 CON2.3
REL2_NO
  Top 3.048: CON2.1 50.72,88.98 REL2.S
  Bottom 3.048: CON2.1 50.72,88.98 REL2.S
RIN
  Bottom 0.254: EXT2.13 22.86,62.23 22.86,64.64 R15.2
  Bottom 0.61: R15.2 RIN.P$1
RTS_N
  Top 0.203: 46.23,52.32 46.3,52.25 47.68,52.25 47.75,52.32
  Top 0.254: EXT2.15 23.37,59.18 26.92,59.18 30.99,55.12 43.43,55.12 46.23,52.32 | EXT4.15 54.61,64.14 54.61,59.18 47.75,52.32
RXD
  Top 0.203: 10.01,59.84 9.98,59.87 9.98,62.41 9.96,62.43 | 45.87,49.38 45.9,49.35 48.08,49.35 48.11,49.38
  Top 0.254: 9.96,62.43 EXT2.26 | 10.01,59.84 10.67,59.18 20.07,59.18 21.59,57.66 26.16,57.66 30.23,53.59 41.66,53.59 45.87,49.38 | EXT4.18 59.05,63.5 57.28,63.5 56.01,62.23 56.01,57.28 48.11,49.38
RXIM0
  Bottom 0.203: 12.89,26.48 12.87,26.5 12.87,29.05 12.84,29.07
  Bottom 0.254: LAN2.8 22,20.16 19.11,23.05 14.33,23.05 13.97,23.41 EXT1.21 12.89,26.48 | RM4.1.1 11.94,31.11 11.94,29.97 12.84,29.07
RXIM1
  Top 0.203: 17.98,26.47 17.96,26.49 17.96,28.63 17.98,28.65 | 46.29,39.18 46.32,39.2 47.88,39.2 47.9,39.23
  Top 0.254: 17.98,28.65 25.08,35.75 42.86,35.75 46.29,39.18 | 47.9,39.23 54.39,45.72 59.05,45.72 EXT4.32 | EXT1.17 17.98,26.47
RXIM2
  Top 0.203: 23.06,26.47 23.04,26.49 23.04,28.63 23.06,28.65 | 46.29,34.1 46.32,34.12 47.88,34.12 47.9,34.15
  Top 0.254: EXT1.13 23.06,26.47 | 23.06,28.65 27.11,32.7 44.9,32.7 46.29,34.1 | 47.9,34.15 54.39,40.64 59.05,40.64 EXT4.36
RXIM3
  Top 0.203: 28.13,26.48 28.11,26.5 28.11,28.61 28.13,28.64 | 46.08,29.07 46.1,29.05 47.88,29.05 47.9,29.07
  Top 0.254: EXT1.9 28.13,26.48 | 28.13,28.64 29.15,29.65 45.49,29.65 46.08,29.07 | EXT4.40 59.05,35.56 54.39,35.56 47.9,29.07
RXIM4
  Bottom 0.203: 33.22,26.47 33.2,26.49 33.2,29.03 33.17,29.06
  Bottom 0.254: LAN1.8 40.29,20.16 37.4,23.05 34.65,23.05 34.29,23.41 EXT1.5 33.22,26.47 | RM3.1.1 32.26,31.11 32.26,29.97 33.17,29.06
RXIP0
  Bottom 0.203: 12.51,26.48 12.54,26.5 12.54,28.61 12.51,28.64
  Bottom 0.254: LAN2.7 20.82,20.8 18.95,22.67 14.16,22.67 EXT1.23 12.51,26.48 | RM4.2.1 11.43,31.24 11.43,29.72 12.51,28.64
RXIP1
  Top 0.203: 17.58,26.47 17.6,26.49 17.6,28.82 17.63,28.84 | 46.05,39.48 46.1,39.53 47.66,39.53 47.69,39.56
  Top 0.254: 17.63,28.84 24.92,36.13 42.7,36.13 46.05,39.48 | 47.69,39.56 54.23,46.1 56.9,46.1 EXT4.31 | EXT1.19 17.58,26.47
RXIP2
  Top 0.203: 22.66,26.47 22.68,26.49 22.68,28.82 22.71,28.84 | 46.08,34.43 46.1,34.45 47.66,34.45 47.69,34.48
  Top 0.254: EXT1.15 22.66,26.47 | 22.71,28.84 26.95,33.08 44.73,33.08 46.08,34.43 | 47.69,34.48 54.23,41.02 56.9,41.02 EXT4.35
RXIP3
  Top 0.203: 27.75,26.48 27.77,26.5 27.77,28.83 27.8,28.85 | 46.29,29.4 46.32,29.38 47.66,29.38 47.69,29.4
  Top 0.254: EXT1.11 27.75,26.48 | EXT4.39 56.9,35.94 54.23,35.94 47.69,29.4 | 46.29,29.4 45.66,30.04 28.98,30.04 27.8,28.85
RXIP4
  Bottom 0.203: 32.82,26.47 32.84,26.49 32.84,28.63 32.82,28.65
  Bottom 0.254: LAN1.7 39.24,17.76 39.24,20.66 37.24,22.67 34.48,22.67 EXT1.7 32.82,26.47 | RM3.2.1 31.62,31.11 31.75,30.99 31.75,29.72 32.82,28.65
SPI_CLK  (via drill 0.6)
  Top 0.254: v43.31,42.8 41.91,42.8 34.67,50.04 28.45,50.04 24.38,54.1 19.81,54.1 19.05,54.86 17.4,54.86 16.38,55.88 11.43,55.88 6.6,60.71 6.6,66.93 7.62,67.94 7.62,69.85
  Top 0.61: 7.62,69.85 PROG.4
  Bottom 0.203: 45.87,34.14 45.9,34.11 47.68,34.11 47.7,34.09
  Bottom 0.254: UEXT.9 56.01,18.29 56.01,19.3 50.04,25.27 50.04,31.75 47.7,34.09 | EXT3.7 45.85,40.64 43.69,42.8 v43.31,42.8 42.29,42.8 41.66,42.16 41.66,39.88 45.21,36.32 45.21,34.8 45.87,34.14
SPI_CS0
  Top 0.254: EXT3.8 45.97,44.2 44.2,44.2 42.93,45.47 42.93,46.74 39.12,50.55 28.7,50.55 24.64,54.61 20.07,54.61 19.3,55.37 17.65,55.37 16.64,56.39 11.68,56.39 7.11,60.96 7.11,66.8 10.79,70.48
  Top 0.61: 10.79,70.48 PROG.5
SPI_CS1  (via drill 0.6)
  Top 0.254: v42.55,40.13 41.15,38.73 22.99,38.73 13.84,29.59 8.64,29.59 7.62,28.57 7.62,26.67 EXT1.25
  Bottom 0.203: 46.28,34.49 46.3,34.47 48.08,34.47 48.11,34.44
  Bottom 0.254: 48.11,34.44 50.55,32 50.55,25.53 56.52,19.56 56.52,18.54 57.28,17.78 59.05,17.78 UEXT.10 59.94,16.51 58.04,14.61 R84.1 | v42.55,40.13 42.55,39.75 45.72,36.58 45.72,35.05 46.28,34.49
SPI_MISO  (via drill 0.6)
  Top 0.254: v43.31,41.02 42.16,41.02 34.16,49.02 27.94,49.02 23.88,53.09 19.3,53.09 18.54,53.85 16.89,53.85 15.88,54.86 10.92,54.86 5.59,60.2 5.59,64.9 2.54,67.94 2.54,69.85 2.67,69.98
  Top 0.61: 2.67,69.98 PROG.2
  Bottom 0.254: UEXT.7 51.05,25.78 51.05,33.27 48.77,35.56 EXT3.5 46.99,36.07 43.43,39.62 43.43,40.89 v43.31,41.02
SPI_MOSI  (via drill 0.6)
  Top 0.254: v42.55,41.91 42.04,41.91 34.42,49.53 28.19,49.53 24.13,53.59 19.56,53.59 18.8,54.36 17.14,54.36 16.13,55.37 11.18,55.37 6.1,60.45 6.1,66.93 5.08,67.94 5.08,69.85
  Top 0.61: 5.08,69.85 PROG.3
  Bottom 0.254: UEXT.8 59.05,20.32 57.28,20.32 51.56,26.04 51.56,33.53 EXT3.6 46.99,38.73 43.81,41.91 v42.55,41.91
TXD
  Top 0.203: 10.36,60.25 10.34,60.27 10.34,62.41 10.36,62.43 | 46.28,49.73 46.3,49.71 47.68,49.71 47.7,49.73
  Top 0.254: 10.36,62.43 EXT2.24 | 10.36,60.25 10.92,59.69 20.32,59.69 21.84,58.17 26.42,58.17 30.48,54.1 41.91,54.1 46.28,49.73 | EXT4.17 55.5,62.48 55.5,57.53 47.7,49.73
TXOM0
  Bottom 0.203: 10.35,24.7 10.32,24.73 10.32,26.84 10.35,26.86
  Bottom 0.254: 10.35,26.86 EXT1.24 10.41,28.96 10.41,31.24 RM4.3.1 | LAN2.2 13.78,20.85 13.78,21.27 10.35,24.7
TXOM1
  Top 0.203: 46.29,41.72 46.32,41.74 47.88,41.74 47.9,41.77
  Top 0.254: 46.29,41.72 41.85,37.27 23.85,37.27 16.51,29.93 EXT1.20 | 47.9,41.77 54.39,48.26 59.05,48.26 EXT4.30
TXOM2
  Top 0.203: 46.29,36.64 46.32,36.66 47.88,36.66 47.9,36.69
  Top 0.254: EXT1.16 21.59,29.93 25.88,34.23 43.88,34.23 46.29,36.64 | 47.9,36.69 54.39,43.18 59.05,43.18 EXT4.34
TXOM3
  Top 0.203: 46.29,31.56 46.32,31.59 47.88,31.59 47.9,31.61
  Top 0.254: EXT1.12 26.67,29.93 27.91,31.18 45.91,31.18 46.29,31.56 | EXT4.38 59.05,38.1 54.39,38.1 47.9,31.61
TXOM4
  Bottom 0.203: 30.68,24.69 30.66,24.71 30.66,26.85 30.68,26.87
  Bottom 0.254: RM3.3.1 30.73,31.24 30.73,28.96 EXT1.8 30.68,26.87 | LAN1.2 32.07,20.85 32.07,23.3 30.68,24.69
TXOP0
  Bottom 0.203: 10.02,24.49 9.99,24.51 9.99,26.84 9.97,26.86
  Bottom 0.254: 9.97,26.86 EXT1.26 9.91,28.96 9.91,31.11 RM4.4.1 | LAN2.1 13.4,17.82 13.4,21.11 10.02,24.49
TXOP1
  Top 0.203: 46.08,42.05 46.1,42.08 47.66,42.08 47.69,42.1
  Top 0.254: 46.08,42.05 41.68,37.66 23.69,37.66 EXT1.22 | 47.69,42.1 54.23,48.64 56.9,48.64 EXT4.29
TXOP2
  Top 0.203: 46.08,36.97 46.1,36.99 47.66,36.99 47.69,37.02
  Top 0.254: EXT1.18 25.72,34.61 43.71,34.61 46.08,36.97 | 47.69,37.02 54.23,43.56 56.9,43.56 EXT4.33
TXOP3
  Top 0.203: 47.69,31.94 47.66,31.91 46.1,31.91 46.08,31.89
  Top 0.254: EXT1.14 27.75,31.56 45.74,31.56 46.08,31.89 | EXT4.37 56.9,38.48 54.23,38.48 47.69,31.94
TXOP4
  Bottom 0.203: 30.33,24.5 30.3,24.52 30.3,26.85 30.28,26.87
  Bottom 0.254: RM3.4.1 30.23,31.11 30.23,28.96 EXT1.10 30.28,26.87 | LAN1.1 31.69,17.82 31.69,23.14 30.33,24.5
UART_RXD2  (via drill 0.6)
  Top 0.254: v44.32,46.23 44.32,46.86 39.62,51.56 29.21,51.56 25.15,55.63 20.57,55.63 19.81,56.39 18.16,56.39 17.14,57.4 13.97,57.4 12.7,58.67 10.16,58.67 8.89,59.94 EXT2.25 7.62,62.23 7.62,65.91 v8.13,66.42
  Bottom 0.203: 46.28,44.65 46.3,44.63 48.08,44.63 48.11,44.6
  Bottom 0.254: UEXT.4 59.05,25.4 55.24,25.4 53.59,27.05 53.59,39.12 48.11,44.6 | v44.32,46.23 44.7,46.23 46.28,44.65 | v8.13,66.42 7.75,66.8 3.68,66.8 2.54,67.94 2.54,72.01 3.17,72.64 3.56,72.64 R64.1
  Bottom 1.016: R64.1 D2.A
UART_TXD2  (via drill 0.6)
  Top 0.254: v44.7,45.09 44.07,45.09 43.43,45.72 43.43,46.99 39.37,51.05 28.96,51.05 24.89,55.12 20.32,55.12 19.56,55.88 17.91,55.88 16.89,56.9 13.72,56.9 12.83,57.78 v11.81,57.78 | EXT2.23 12.7,62.23 12.7,64.01 10.29,66.42 v9.4,66.42
  Bottom 0.203: 45.49,44.3 45.52,44.27 47.68,44.27 47.7,44.25
  Bottom 0.254: UEXT.3 55.75,24.13 53.09,26.8 53.09,38.86 47.7,44.25 | v44.7,45.09 45.49,44.3 | v11.81,57.78 11.43,58.17 EXT2.23 | v9.4,66.42 8.51,67.31
  Bottom 0.61: 8.51,67.31 7.24,68.58 UART0.3
UGATE
  Bottom 0.254: EXT4.20 59.05,60.96 49.53,60.96 EXT3.14
UPHY0_PADM
  Bottom 0.254: USB_HOST.2 50.04,15.74 50.04,19.18 49.02,20.19 49.02,20.95 | 49.02,20.95 C2.1 | EXT1.4 38.1,26.67 38.1,24.38 38.99,23.5 47.75,23.5 49.02,22.23 49.02,20.95
UPHY0_PADP
  Bottom 0.254: USB_HOST.3 47.75,17.79 47.75,19.3 48.64,20.19 48.64,20.95 | 48.64,20.95 C1.1 | 48.64,20.95 48.64,22.05 47.57,23.11 38.81,23.11 37.8,24.13 36.32,24.13 35.56,24.89 35.56,26.67 EXT1.6
VCC  (via drill 0.6)
  Top 0.381: v61.47,81.28 59.05,81.28 EXT4.3
  Top 1.016: 57.78,27.94 EXT3.2 | 57.78,27.94 UEXT.1 | 62.23,28.45 62.23,15.88 58.93,12.57 v56.9,12.57 56.52,12.57 48.26,4.32 40.01,4.32 | LAN2.AG 23.58,4.32 40.01,4.32 | 57.78,27.94 58.29,28.45 62.23,28.45 | 62.23,28.45 62.23,80.52 v61.47,81.28 | v42.55,60.96 EXT2.1 | v42.55,65.15 40.64,65.15 39.37,66.42 25.91,66.42 19.3,73.03 3.17,73.03 PROG.1 | 40.01,4.32 LAN1.AG
  Bottom 0.381: v61.47,81.28 59.05,81.28 EXT4.3
  Bottom 0.508: R64.2 1.02,73.66 1.02,83.44 R3.2
  Bottom 1.016: EXT3.2 46.48,27.94 38.23,36.2 38.23,45.47 42.55,49.78 v42.55,60.96 v42.55,65.15 | v56.9,12.57 R84.2 R82.2 R83.2 | PROG.1 1.27,73.66 R64.2
VEE  (via drill 0.6)
  Top 0.381: v56.52,78.74 59.05,78.74 EXT4.6
  Bottom 0.381: EXT4.6 59.05,78.74 v56.52,78.74
  Bottom 1.016: EXT3.4 45.47,33.02 40.77,37.72 40.77,44.45 45.09,48.77 45.09,64.14 46.1,65.15 49.66,65.15 55.88,71.37 55.88,78.11 v56.52,78.74
VPP  (via drill 0.6)
  Top 1.016: v44.45,8.13 40.77,8.13 v32.89,16 17.36,16 LAN2.3
  Bottom 1.016: LAN1.3 34.04,16 | LAN2.3 C13.2 | 34.04,16 C89.2 | v44.45,8.13 50.8,8.13 54.48,11.81 54.48,19.56 49.15,24.89 49.15,28.32 EXT3.3 45.97,30.48 39.5,36.96 39.5,44.96 43.81,49.28 43.81,64.77 45.47,66.42 49.15,66.42 54.61,71.88 54.61,78.74 55.88,80.01 EXT4.5 | v32.89,16 34.04,16
WLAN_LED
  Bottom 0.254: EXT2.17 20.32,62.23 20.32,64.01 16.51,67.82 WLAN_LED.P$1

## Text on the board
Top: 236 Errors
Bottom: 325 Errors
tNames: 5VDC Only!!! | 5VDC Only!!! | + | GND | UART_RXD2 | UART_TXD2 | Rev.A | RT5350F-OLinuXino_EVB | 468 Errors
bNames: 5VDC Only!!! | NC | NO | NC | NO | + | - | UART_RXD2 | UART_RXD2 | GND | https://www.olimex.com | (C) 2014